# Altium PCB TelecarMasterDriverStc8051.PcbDoc
Units mil, origin at the board's own origin, x right, y up, seen from the top; angles counter-clockwise.
Board outline 6000 x 4000 mil, 2 copper layers (Top Layer, Bottom Layer); 16 components, 38 nets, 58 pads, 1 vias.
Unrouted connection lines stored in the file: 4.
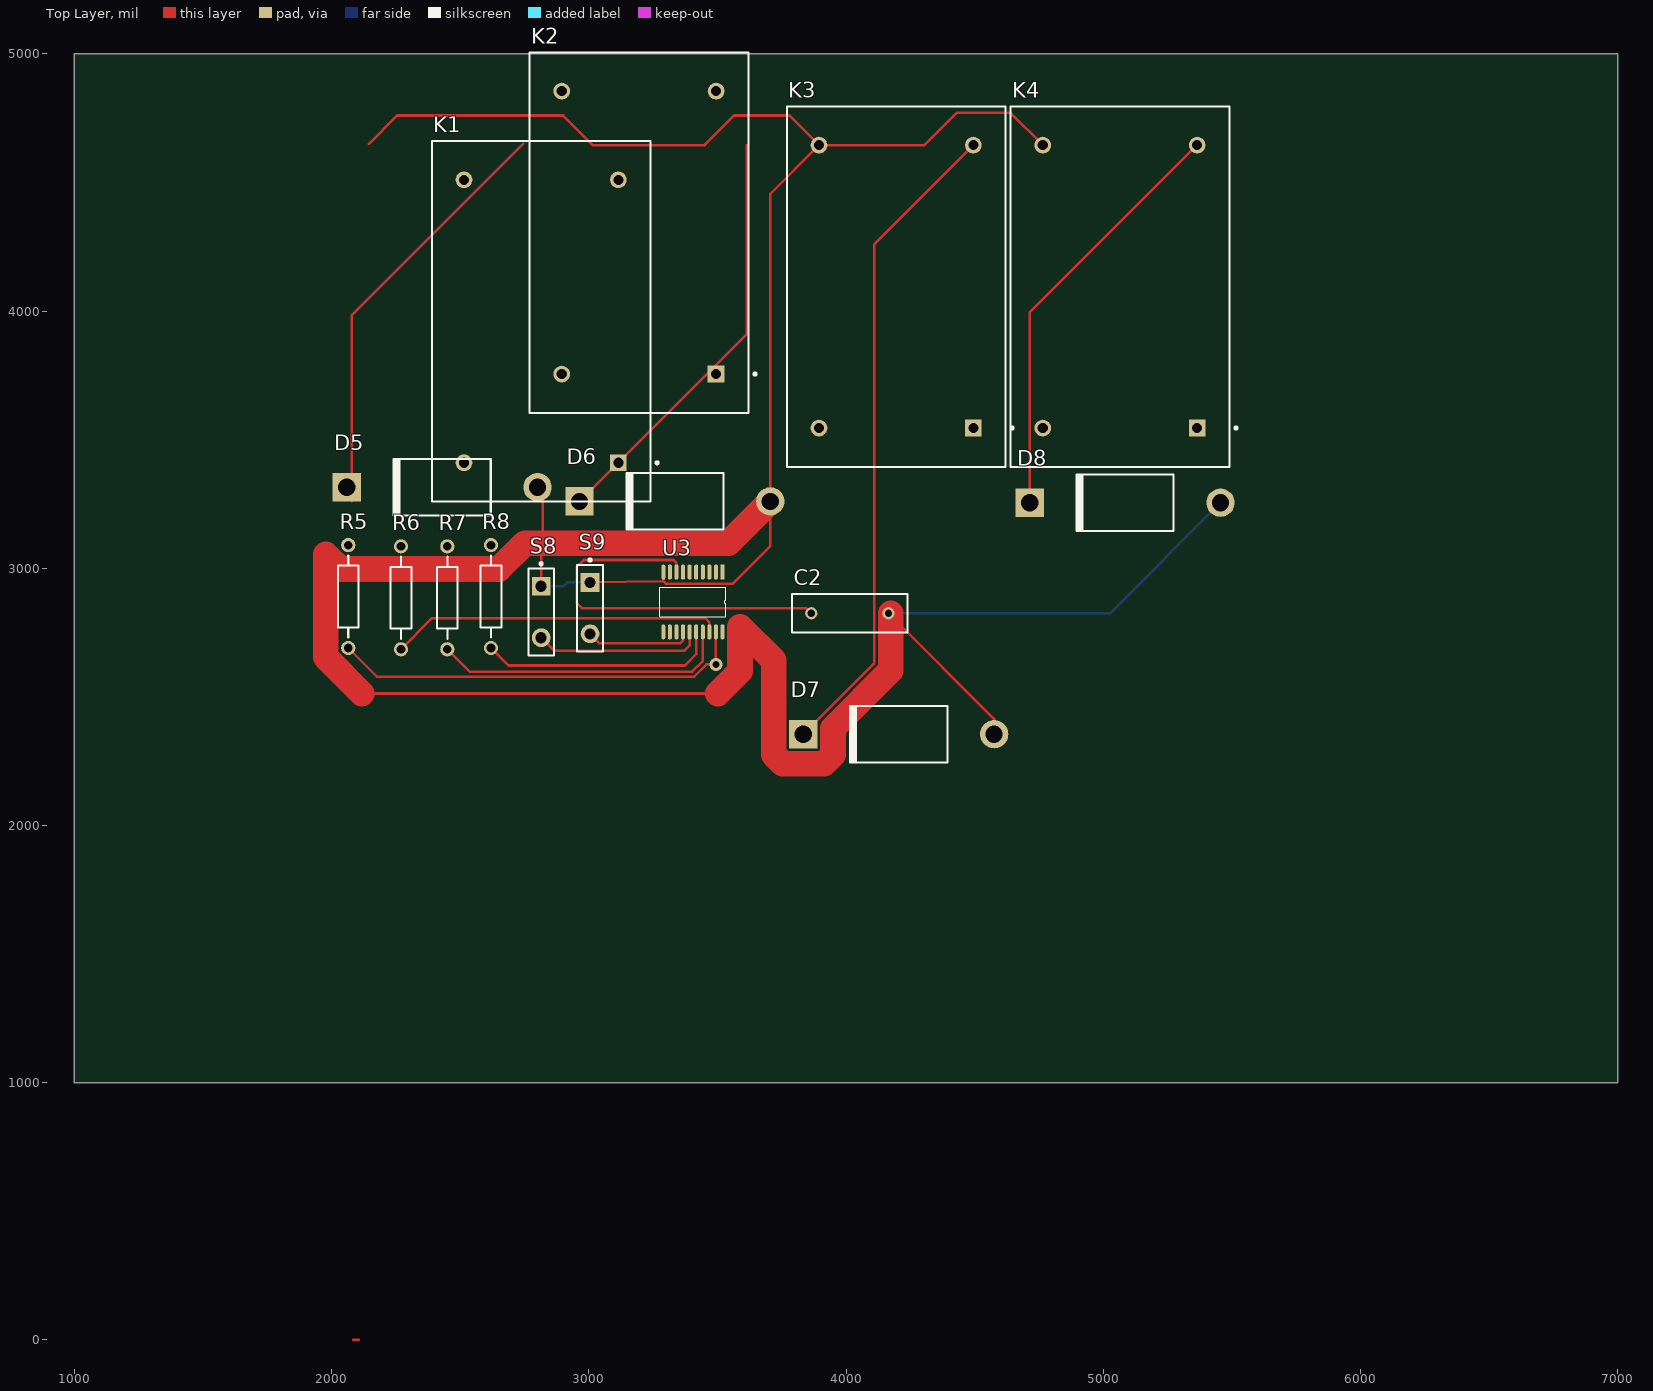
[diagram p0: Top Layer view]
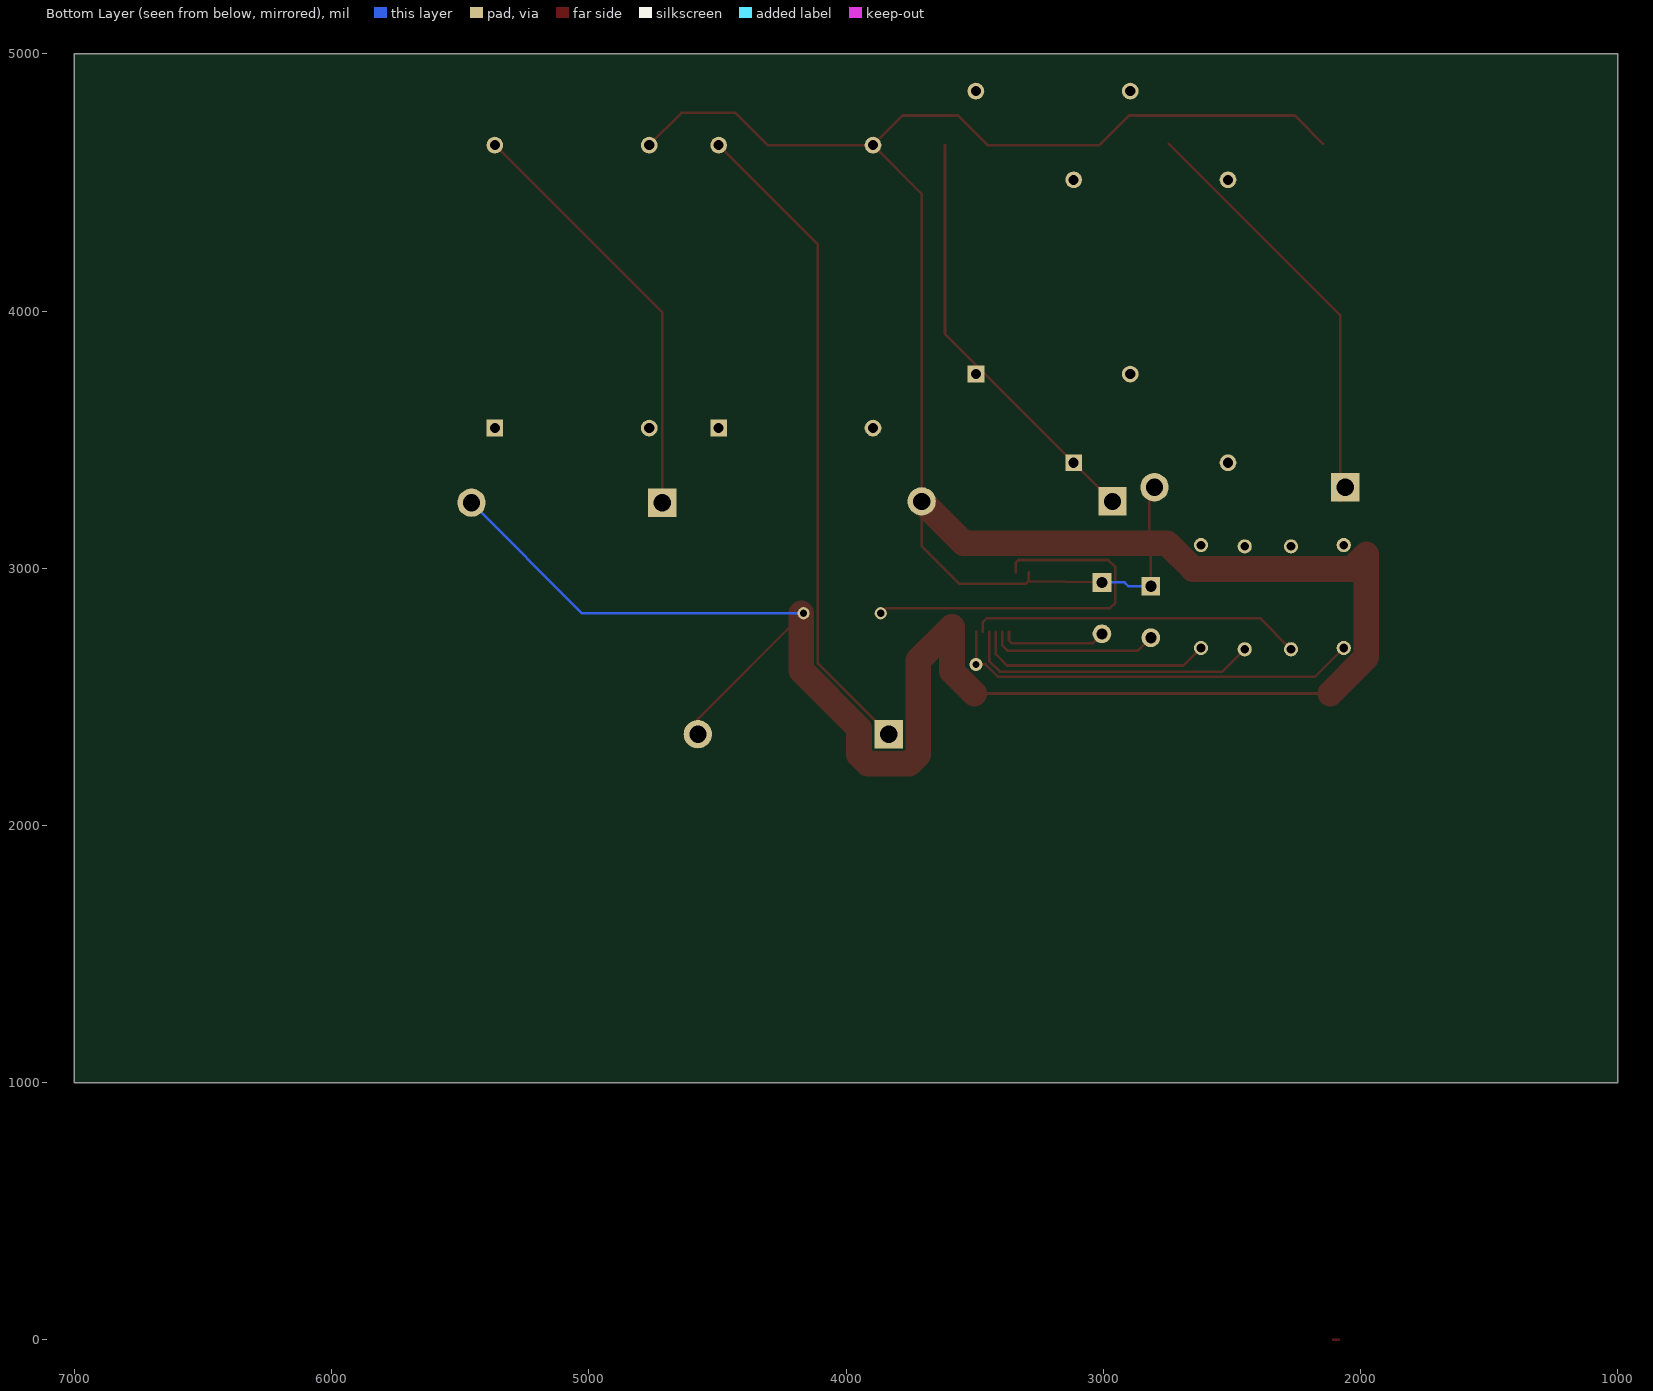
[diagram p1: Bottom Layer view, seen from below]

## Layer stack, top to bottom
Top Layer: signal copper 1.4
Dielectric: dielectric 12.6, FR-4, Dk 4.8
Bottom Layer: signal copper 1.4

## Board outline
1000,1000 7000,1000 7000,5000 1000,5000

## Design rules (kind name [scope] priority, off if disabled: settings)
Clearance [All] p1: gap=10
PolygonConnect [All] p1: connectstyle=Relief reliefconductorwidth=10 reliefentries=4 polygonreliefangle="90 Angle"
RoomDefinition TelecarRemoteControlStc8051 [InComponentClass('TelecarRemoteControlStc8051')] p1: confinementstyle=ConfineIn formatcopy=TRUE lockcomponents=FALSE outline 7545,1680 13965,1680 13965,3200 7545,3200
RoutingTopology [All] p1: topology=Starburst
RoutingVias [All] p1: holewidth=28 width=50 viastyle="Through Hole" minholewidth=28 minwidth=50 maxholewidth=28 maxwidth=50
SilkscreenOverComponentPads [All] p1: minsilkscreentomaskgap=10
SolderMaskExpansion [All] p1: expansion=4
Width [All] p1: maxlimit=100 minlimit=10 preferedwidth=10 bottomlayer_maxwidth=10 minimp=50.000000 maximp=50.000000 favimp=50.000000
26 further rules are at their usual default settings.

## Classes and differential pairs
component class TelecarMasterDriverStc8051: U1

## Components (designator, comment, footprint, x,y, rotation, side; value= is the part's Value field where it differs from the comment)
C2 "Cap" RAD-0.3 4015,2825 r180 top
D5 "Diode 1N5408" DIO18.84-9.6x5.6 2430,3315 r180 top
D6 "Diode 1N5408" DIO18.84-9.6x5.6 3335,3260 r180 top
D7 "Diode 1N5408" DIO18.84-9.6x5.6 4205,2355 r180 top
D8 "Diode 1N5408" DIO18.84-9.6x5.6 5085,3255 r180 top
K1 "Relay-SPST" DIP-P4 2815,3960 r90 top
K2 "Relay-SPST" DIP-P4 3195,4305 r90 top
K3 "Relay-SPST" DIP-P4 4195,4095 r90 top
K4 "Relay-SPST" DIP-P4 5065,4095 r90 top
R5 "Res2" AXIAL-0.4 2065,2890 r270 top
R6 "Res2" AXIAL-0.4 2270,2885 r270 top
R7 "Res2" AXIAL-0.4 2450,2885 r270 top
R8 "Res2" AXIAL-0.4 2620,2890 r270 top
S8 "SW-PB" SPST-2 2815,2830 r270 top
S9 "SW-PB" SPST-2 3005,2845 r270 top
U3 "STC15W401AS_SOP20_DIP20 _TSSOP20" TSSOP20 3520,2985 r270 top

## Footprints (in the part's own frame and the unit in brackets; to place one, negate y for a bottom-side part, rotate by r counter-clockwise, add the part's x,y. Pads: shape width x height; smd on the part's side, far side on the other; paste and mask are expansions set on the pad)
AXIAL-0.4 [mm] "Axial Device, Thru-Hole; 2 Leads; 0.4 in Pin Spacing"
  round 1.4 hole 0.85: 1(-5.08,0) 2(5.08,0)
  silkscreen extent -4.06,-1.02 4.06,1.02
DIO18.84-9.6x5.6 [mm] "Diode, Axial; Body 9.5 x 5.6 mm (LxDia. max), Lead Dia. 1.32 mm (max)"
  round 2.8 hole 1.7: 1(-9.42,0)
  rect 2.8x2.8 hole 1.7: 2(9.42,0)
  silkscreen extent -4.8,-2.8 4.9,2.8
DIP-P4 [mm] "DIP; 4 Round Pins; Row Space 27.94 mm; Pitch 15.24 mm"
  rect 1.65x1.65 hole 1: 1(-13.97,-7.62)
  round 1.65 hole 1: 2(-13.97,7.62) 3(13.97,-7.62) 4(13.97,7.62)
  silkscreen extent -17.8,-11.58 17.8,10.8, body extent -17.8,-10.8 17.8,10.8, height 14
RAD-0.3 [mm] "Radial Cap, Thru-Hole; 2 Leads; 0.3 in Pin Spacing"
  round 1.2 hole 0.7: 1(-3.81,0) 2(3.81,0)
  silkscreen extent -5.71,-1.91 5.71,1.91
SPST-2 [mm] "Circuit Breaker; 2 Leads"
  rect 1.85x1.85 hole 1.1: 1(-2.54,0)
  round 1.85 hole 1.1: 2(2.54,0)
  silkscreen extent -4.89,-1.27 4.28,1.27
TSSOP20 [mm]
  rect 1.5x0.4 smd: 1(0,0)
  oval 1.5x0.4 smd: 2(0,-0.65) 3(0,-1.3) 4(0,-1.95) 5(0,-2.6) 6(0,-3.25) 7(0,-3.9) 8(0,-4.55) 9(0,-5.2) 10(0,-5.85) 11(5.9,-5.85) 12(5.9,-5.2) 13(5.9,-4.55) 14(5.9,-3.9) 15(5.9,-3.25) 16(5.9,-2.6) 17(5.9,-1.95) 18(5.9,-1.3) 19(5.9,-0.65) 20(5.9,0)
  silkscreen extent 1.48,-6.17 4.42,0.33

## Part data
C2: "Capacitor"
D5 D6 D7 D8: "3 Amp Medium Power Silicon Rectifier Diode"
K1 K2 K3 K4: "Single-Pole Single-Throw Relay"
R5 R6 R7 R8: "Resistor"
S8 S9: "Switch"

## Via types
v1: diameter 50, hole 28, Top Layer to Bottom Layer, 1 vias

## Nets (pads, with @x,y where several pads share a name; then routed paths per layer and width w, separated by ;. In a path a pad name is that pad's centre, name@x,y a point inside that pad or via, vN(x,y) a via of type N, cw(c..) or ccw(c..) an arc to the next point about the centre after c; other vN are vias at no path point)
GND: C2.1 D5.1 D6.1 D7.1 D8.1 K1.4 K2.4 K3.4 K4.4 S8.1 S9.1 U3.10 | length 13580.7
  Top Layer w10: 2117.94,2513.23 3501.85,2513.23 ; 2145,4650 2255,4760 2900,4760 3015,4645 3450,4645 3565,4760 3780,4760 K3.4 ; S8.1 2815,3092 2820,3097 2820.87,3097.87 2820.87,3260 ; S9.1 3289.68,2950 ; U3.10 3289.68,2950 ; C2.1 4174,2816 4575.87,2414.13 D7.1 ; K4.4 4640,4770 4430,4770 4305,4645 K3.4 ; 3289.68,2950 3299.68,2940 3560,2940 3705.87,3085.87 D6.1 3705.87,4455.87 K3.4
  Top Layer w100: 2117.94,2513.23 1977.44,2653.73 1977.44,3053.73 2033.73,2997.44 2651.27,2997.44 2750.83,3097 2820,3097 3542.87,3097 D6.1 ; 3501.85,2513.23 3587.87,2599.26 3587.87,2772.87 3719.02,2641.73 3719.02,2275.03 3754.16,2239.88 3914.1,2239.88 3949.25,2275.03 3949.25,2378.19 4174,2602.94 4174,2816 C2.1@4174,2825
  Bottom Layer w10: S8.1 2902,2930 2917,2945 S9.1 ; C2.1 5025.87,2825 D8.1
IN1: S8.2 U3.15 | length 658.8
  Top Layer w10: S8.2 2865,2680 3372.05,2680 3392.05,2700 U3.15
IN2: S9.2 U3.14 | length 414.5
  Top Layer w10: S9.2 3042,2708 3354.46,2708 3366.46,2720 U3.14
KEY1: 
KEY2: 
KEY3: 
KEY4: 
KEY5: 
KEY6: 
KEY7: 
LEDF: 
LEDFREQUENCY: 
LEDL: 
LEDM: 
"LT8910 CLK": U3.4
"LT8910 MISO": U3.3
"LT8910 MOSI": U3.2
"LT8910 NSS": U3.1
"LT8910 PKT": U3.13
"LT8910 RESET": U3.12
NetD1_1: 
NetD2_1: 
NetD3_1: 
NetD4_1: 
NetD5_2: D5.2 K1.3 | length 1665.8
  Top Layer w10: D5.2@2079.13,3260 2079.13,3984.13 2745,4650
NetD6_2: D6.2 K2.3 | length 1654.6
  Top Layer w10: D6.2 3615,3910.87 3615,4645
NetD7_2: D7.2 K3.3 | length 2563.7
  Top Layer w10: D7.2 4109,2629.87 4109,4259 K3.3
NetD8_2: D8.2 K4.3 | length 1659.6
  Top Layer w10: D8.2 4714.13,3994.13 K4.3
NetQ1_2: R5.1
NetQ2_2: R6.1
NetQ3_2: R7.1
NetQ4_2: R8.1
OUT1: R5.2 U3.19 | length 1622.2
  Top Layer w10: R5.2 2176.77,2578.23 3409.74,2578.23 3457.51,2626 v1(3494.41,2626) U3.19
OUT2: R6.2 U3.18 | length 1292.8
  Top Layer w10: R6.2 2391,2806 3452.82,2806 3468.82,2790 U3.18
OUT3: R7.2 U3.17 | length 1159.2
  Top Layer w10: R7.2 2536.77,2598.23 3401.46,2598.23 3443.23,2640 U3.17
OUT4: R8.2 U3.16 | length 931
  Top Layer w10: R8.2 2688,2622 3374,2622 3417.64,2665.64 U3.16
PWM: U3.20
VCC: C2.2 U3.8 | length 1507.7
  Top Layer w10: U3.8 3340.87,3021.13 3330,3032 2981,3032 2953,3004 2953,2865 2973,2845 3845,2845 C2.2
pads on no net: K1.1 K1.2 K2.1 K2.2 K3.1 K3.2 K4.1 K4.2 U3.5 U3.6 U3.7 U3.9 U3.11
copper on no net: | length 20
  Top Layer w10: 2085,0 2105,0